# EAGLE board Hive 1.2 (EAGLE 9.6.2)
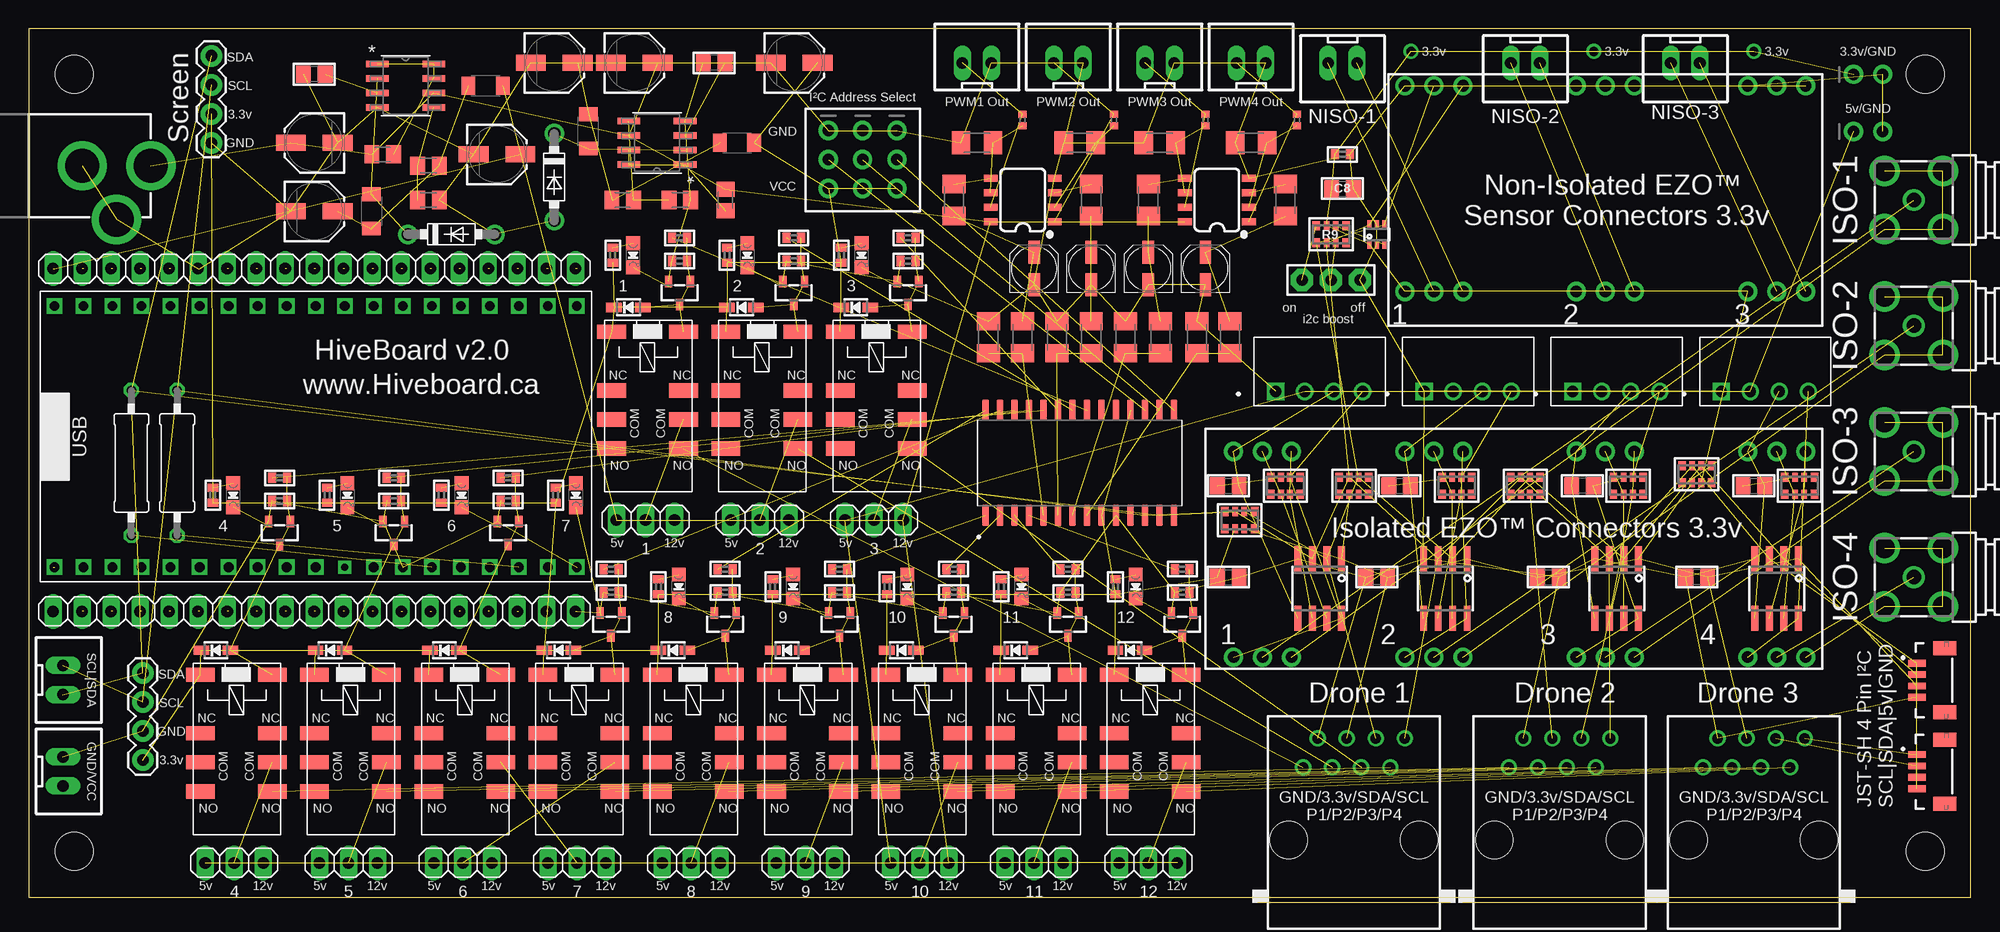
[diagram p0: board, top side]
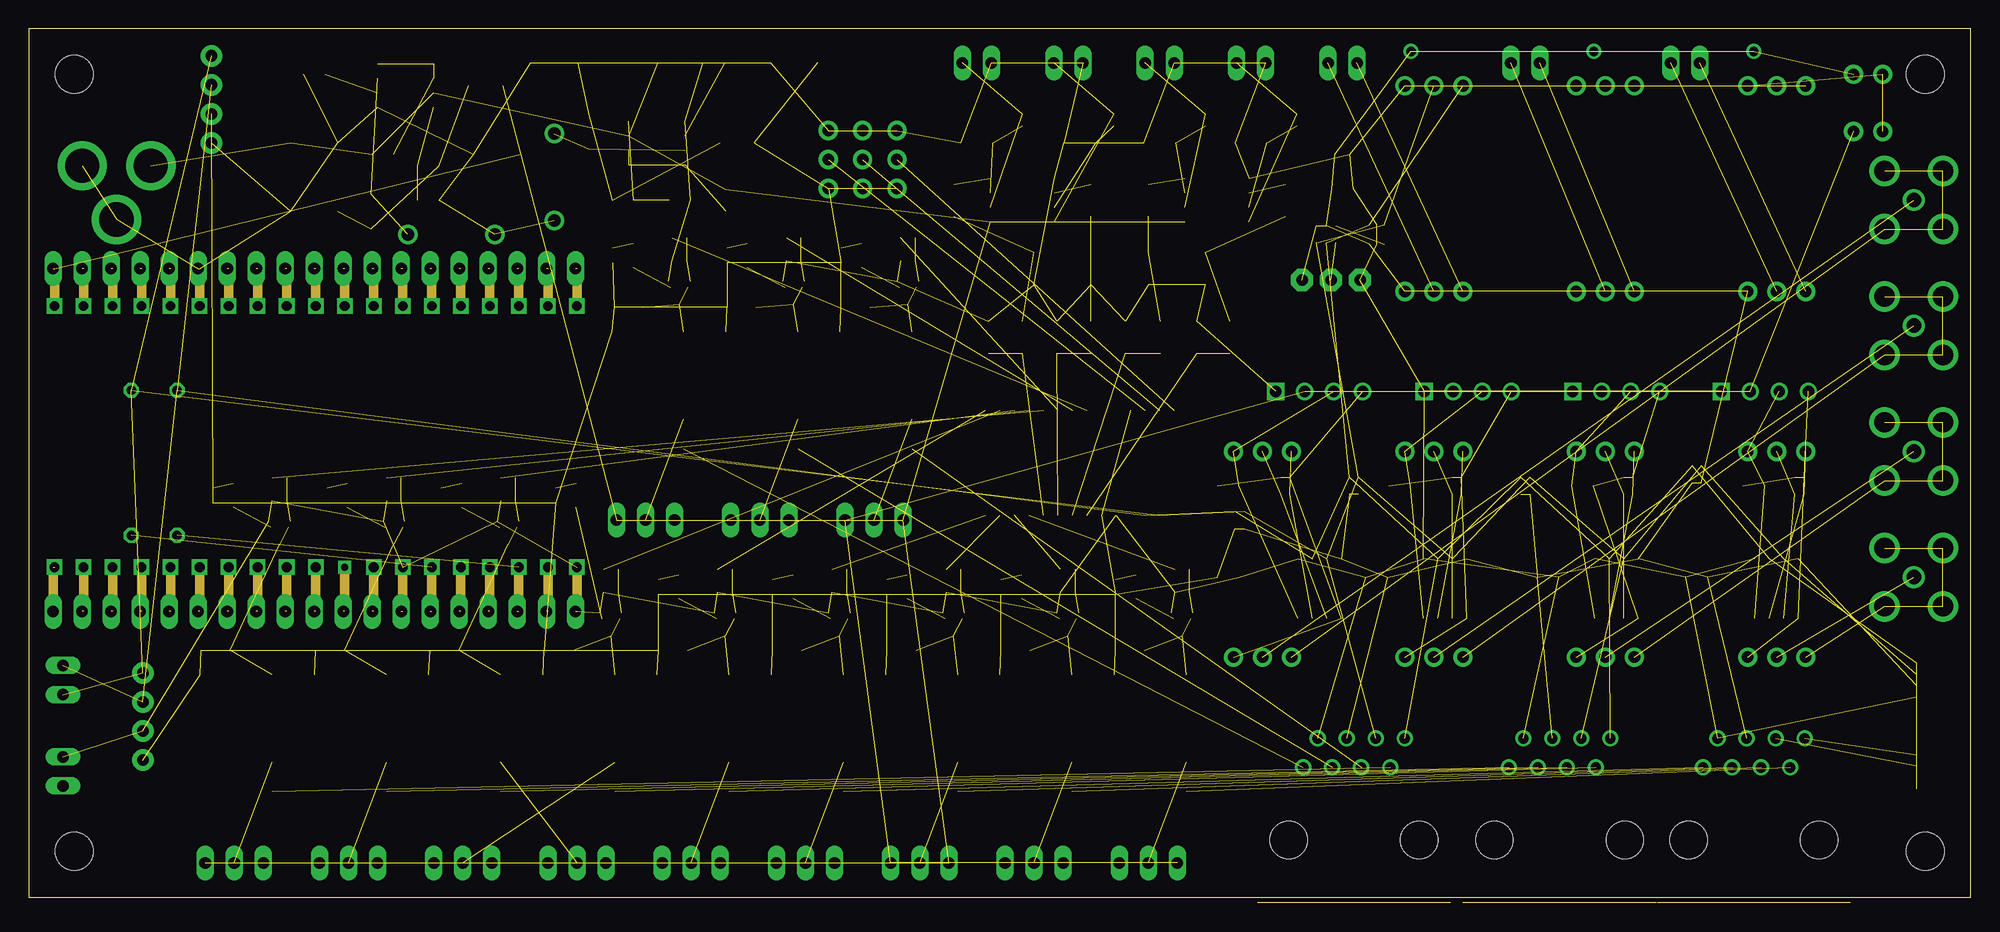
[diagram p1: board, inner layer Route2]
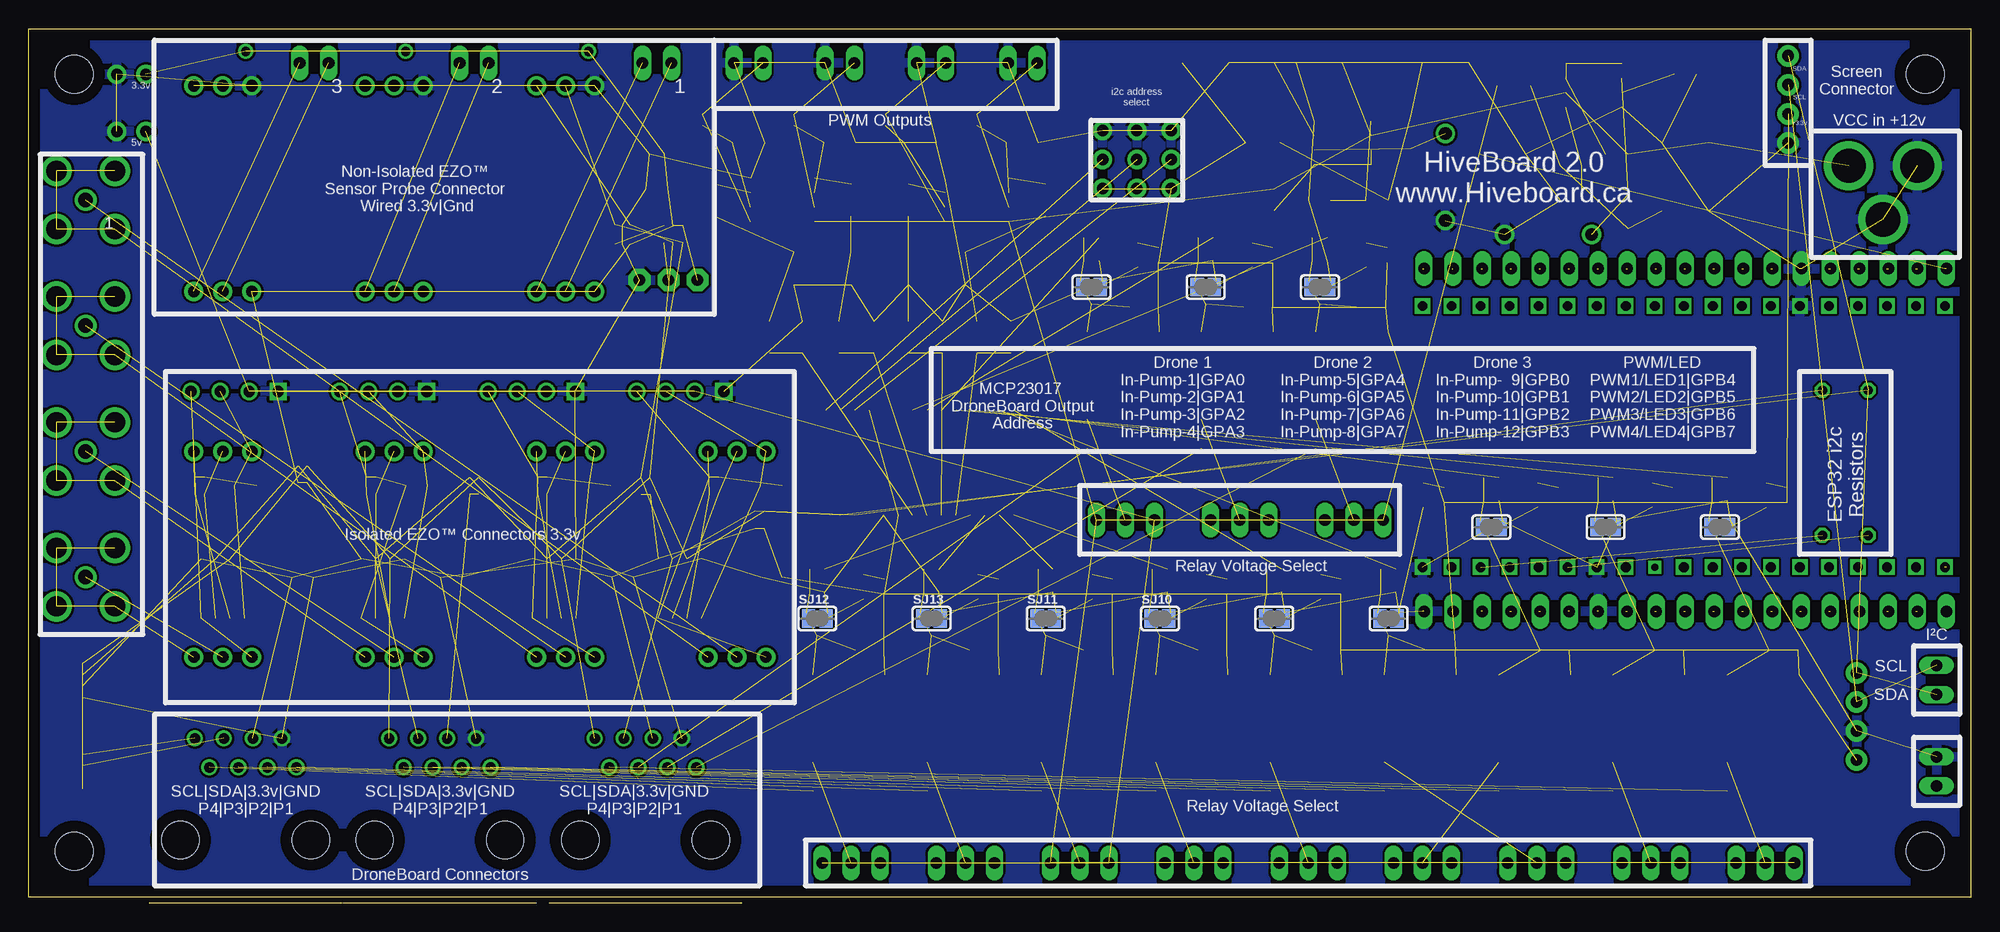
[diagram p2: board, bottom side, seen from below]

Size 170 x 76 mm. Coordinates in mm from the lower left corner, seen from the top.
Outline: 0,0 170,0 170,76 0,76 0,0
Copper layers (1+2*15+16): Top 0.035mm / dielectric 1.5mm / Route2 0.035mm / dielectric 0.15mm / Route15 0.035mm / dielectric 0.2mm / Bottom 0.035mm
Design rules "default *": minimum track width 6mil, minimum drill 0.35mm, track to track 6mil, track to pad 6mil, pad to pad 6mil, via to via 6mil, smd to smd 6mil, copper to edge 40mil, drill to drill 6mil, minimum pad ring 10mil, minimum via ring 8mil, stop-mask expansion 4mil, vias tented up to drill 0mil, thermal gap 10mil
Net classes: 0 default: width 0.254 mm, clearance 0.203 mm; 1 HV: width 0.406 mm, drill 0.381 mm, clearance 1.016 mm; 2 12v: width 0.457 mm, drill 0.102 mm, clearance 0.254 mm; 3 5v: width 0.406 mm, drill 0.102 mm, clearance 0.254 mm; 4 3.3v: width 0.406 mm, drill 0.102 mm, clearance 0.254 mm; 5 i2c: width 0.356 mm, drill 0.102 mm, clearance 0.254 mm; 6 GPIO: width 0.356 mm, drill 0.102 mm, clearance 0.254 mm; 8 New Class: drill 0.102 mm, clearance 0.152 mm

## Footprints (pad centres in the part's own frame; a part is rotated, then mirrored left to right if it is on the bottom)
PANASONIC_C = smd 2.6 x 1.4: + 2.05,0; - -2.05,0
UD-4X5,8_NICHICON = smd 2 x 1: + 1.425,0; - -1.425,0
0805 = smd 1.3 x 1.5: 1 -0.95,0; 2 0.95,0
0402 = smd 0.7 x 0.9: 1 -0.65,0; 2 0.65,0
DO41-7.6 = drill 1.1 pad 1.7: A 3.81,0; C -3.81,0
SOD-323 = smd 1.35 x 0.8: A 1.27,0; C -1.27,0
CHIPLED_0805_NOOUTLINE = smd 1.2 x 1.2: A 0,-1.05; C 0,1.05
STAND-OFF = hole 3.302: 0,0
SC70-6L = smd 0.35 x 0.8: 1 -0.65,-0.85; 2 0,-0.85; 3 0.65,-0.85; 4 0.65,0.85; 5 0,0.85; 6 -0.65,0.85
1X04 = drill 1.016 pad 1.88: 1 0,0; 2 2.54,0; 3 5.08,0; 4 7.62,0
JST04_1MM_VERT = smd 0.6 x 1.55: 1 -1.478,0.775; 2 -0.478,0.775; 3 0.522,0.775; 4 1.522,0.775 | smd 1.2 x 2: NC1 -2.778,3.2; NC2 2.822,3.2
POWER_JACK_PTH = drill 2.997 pad 4.318: GND 0,7.7; GNDBREAK 4.7,10.7; PWR 0,13.7
1X03_ROUND = drill 1 pad 1.676: 1 -2.54,0; 2 0,0; 3 2.54,0
1X01_2MM = drill 0.8 pad 1.27: 1 0,0
1X03-CLEANBIG = drill 1.016 pad 1.676: 1 -2.54,0; 2 0,0; 3 2.54,0
1X03 = drill 1.016 long: 1 -2.54,0; 2 0,0; 3 2.54,0
JUMPER3 = drill 1 pad 1.93 octagon: 1 -2.54,0; 2 0,0; 3 2.54,0
1X02_ROUND = drill 1 pad 1.676: 1 -1.27,0; 2 1.27,0
1X19 = drill 1.016 long: 1 -22.86,0; 2 -20.32,0; 3 -17.78,0; 4 -15.24,0; 5 -12.7,0; 6 -10.16,0; 7 -7.62,0; 8 -5.08,0; 9 -2.54,0; 10 0,0; 11 2.54,0; 12 5.08,0; 13 7.62,0; 14 10.16,0; 15 12.7,0; 16 15.24,0; 17 17.78,0; 18 20.32,0; 19 22.86,0
L3216C = smd 1.2 x 1.6: 1 -1.5,0; 2 1.5,0
CONV_RFM-0505S = drill 1 square: 1 -3.85,-1.75 | drill 1: 2 -1.31,-1.75; 3 1.23,-1.75; 4 3.77,-1.75
SOT23-R = smd 0.635 x 1.016: 1 -0.95,-1; 2 0.95,-1; 3 0,1
M0805 = smd 1.3 x 1.6: 1 -0.95,0; 2 0.95,0
M1206 = smd 1.6 x 2: 1 -1.4,0; 2 1.4,0
R0402 = smd 0.6 x 0.7: 1 -0.5,0; 2 0.5,0
0309/12 = drill 0.813 octagon: 1 -6.35,0; 2 6.35,0
RESPACK_4X0603 = smd 0.65 x 0.8: 1 -1.3,-0.75; 4 1.3,-0.75; 5 1.3,0.75; 8 -1.3,0.75 | smd 0.5 x 0.8: 2 -0.4,-0.75; 3 0.4,-0.75; 6 0.4,0.75; 7 -0.4,0.75
SOLDERJUMPER_CLOSEDWIRE = smd 1.168 x 1.6: 1 -0.762,0; 2 0.762,0 | smd 0.635 x 0.203: WIRE 0,0
SOIC127P1030X265-28N = smd 1.9 x 0.6: 1 -4.605,8.255; 2 -4.605,6.985; 3 -4.605,5.715; 4 -4.605,4.445; 5 -4.605,3.175; 6 -4.605,1.905; 7 -4.605,0.635; 8 -4.605,-0.635; 9 -4.605,-1.905; 10 -4.605,-3.175; 11 -4.605,-4.445; 12 -4.605,-5.715; 13 -4.605,-6.985; 14 -4.605,-8.255; 15 4.605,-8.255; 16 4.605,-6.985; 17 4.605,-5.715; 18 4.605,-4.445; 19 4.605,-3.175; 20 4.605,-1.905; 21 4.605,-0.635; 22 4.605,0.635; 23 4.605,1.905; 24 4.605,3.175; 25 4.605,4.445; 26 4.605,5.715; 27 4.605,6.985; 28 4.605,8.255
SO08 = smd 0.6 x 1.2: 1 -1.905,-2.8; 2 -0.635,-2.8; 3 0.635,-2.8; 4 1.905,-2.8; 5 1.905,2.8; 6 0.635,2.8; 7 -0.635,2.8; 8 -1.905,2.8
D8 = smd 1.981 x 0.559: 1 -2.464,1.905; 2 -2.464,0.635; 3 -2.464,-0.635; 4 -2.464,-1.905; 5 2.464,-1.905; 6 2.464,-0.635; 7 2.464,0.635; 8 2.464,1.905
ESP32 = drill 0.85 square: 3.3V 1.27,46.99; 5V 1.27,1.27; EN 1.27,44.45; GND1 1.27,13.97; GND2 24.13,46.99; GND3 24.13,31.75; GPIO0 24.13,13.97; GPIO2 24.13,11.43; GPIO4 24.13,16.51; GPIO5 24.13,24.13; GPIO6 24.13,1.27; GPIO7 24.13,3.81; GPIO8 24.13,6.35; GPIO9 1.27,8.89; GPIO10 1.27,6.35; GPIO11 1.27,3.81; GPIO12 1.27,16.51; GPIO13 1.27,11.43; GPIO14 1.27,19.05; GPIO15 24.13,8.89; GPIO16 24.13,19.05; GPIO17 24.13,21.59; GPIO19 24.13,29.21; GPIO21 24.13,34.29; GPIO22 24.13,41.91; GPIO23 24.13,44.45; GPIO25 1.27,26.67; GPIO26 1.27,24.13; GPIO27 1.27,21.59; GPIO32 1.27,31.75; GPIO33 1.27,29.21; GPIO34 1.27,36.83; GPIO35 1.27,34.29; GPIO36 1.27,41.91; GPIO39 1.27,39.37; RX 24.13,36.83; TX 24.13,39.37 | drill 0.6 square: GPIO18 24.13,26.67
JST-XH-02-PACKAGE-LONG-PAD = drill 1.016 long: 1 -1.27,0; 2 1.27,0
RELAY_EE2_NOLATCH = smd 1.25 x 2.5: 1 -6.5,-3.15; 3 -1.37,-3.15; 4 1.17,-3.15; 5 3.71,-3.15; 8 3.71,3.15; 9 1.17,3.15; 10 -1.37,3.15; 12 -6.5,3.15
SOIC8_150MIL = smd 0.6 x 2.2: 1 -1.905,-2.6; 2 -0.635,-2.6; 3 0.635,-2.6; 4 1.905,-2.6; 5 1.905,2.6; 6 0.635,2.6; 7 -0.635,2.6; 8 -1.905,2.6
RJ45-NO-SHIELD = drill 0.9 pad 1.4: 1 -4.445,6.35; 2 -3.175,8.89; 3 -1.905,6.35; 4 -0.635,8.89; 5 0.635,6.35; 6 1.905,8.89; 7 3.175,6.35; 8 4.445,8.89 | hole 3.251: -5.715,0; 5.715,0
BU-SMA-G = drill 1.27: 1 0,0 | drill 1.778: 2 -2.55,2.55; 3 2.55,2.55; 4 2.55,-2.55; 5 -2.55,-2.55

## Placement (x,y rotation side)
C1  470uF  [PANASONIC_C]  25,60 0 top
C1A1  1uf 50v  [UD-4X5,8_NICHICON]  88,55 90 top
C1A2  1uf 50v  [UD-4X5,8_NICHICON]  98,55 90 top
C1B1  1uf 50v  [UD-4X5,8_NICHICON]  93,55 90 top
C1B2  1uf 50v  [UD-4X5,8_NICHICON]  103,55 90 top
C2  100uF  [PANASONIC_C]  25,66 180 top
C3  100uF  [PANASONIC_C]  41,65 0 top
C4  470pF  [0805]  25,72 180 top
C5  470uF  [PANASONIC_C]  46,73 0 top
C6  100uF  [PANASONIC_C]  53,73 0 top
C7  10uF  [0402]  115,65 0 top
C8  0.1uF  [0805]  115,62 0 top
C9  100uF  [PANASONIC_C]  67,73 0 top
C10  0.1uF  [0805]  105,28 0 top
C11  0.1uF  [0805]  105,36 0 top
C12  0.1uF  [0805]  118,28 180 top
C13  0.1uF  [0805]  120,36 0 top
C14  0.1uF  [0805]  133,28 0 top
C15  0.1uF  [0805]  136,36 180 top
C16  0.1uF  [0805]  146,28 180 top
C17  0.1uF  [0805]  151,36 0 top
C18  470pF  [0805]  60,73 180 top
D1  1N5819-B  [DO41-7.6]  37,58 0 top
D2  1N5819-B  [DO41-7.6]  46,63 270 top
D4  1N4148  [SOD-323]  52.5,51.6 0 top
D5  RED  [CHIPLED_0805_NOOUTLINE]  52.91,56.17 180 top
D6  1N4148  [SOD-323]  62.4,51.6 0 top
D7  RED  [CHIPLED_0805_NOOUTLINE]  62.91,56.17 180 top
D8  1N4148  [SOD-323]  72.4,51.6 0 top
D9  RED  [CHIPLED_0805_NOOUTLINE]  72.91,56.17 180 top
D10  1N4148  [SOD-323]  16.4,21.6 0 top
D11  RED  [CHIPLED_0805_NOOUTLINE]  17.91,35.17 180 top
D12  1N4148  [SOD-323]  26.4,21.6 0 top
D13  RED  [CHIPLED_0805_NOOUTLINE]  27.91,35.17 180 top
D14  1N4148  [SOD-323]  36.4,21.6 0 top
D15  RED  [CHIPLED_0805_NOOUTLINE]  37.91,35.17 180 top
D16  1N4148  [SOD-323]  46.4,21.6 0 top
D17  RED  [CHIPLED_0805_NOOUTLINE]  47.91,35.17 180 top
D18  1N4148  [SOD-323]  56.4,21.6 0 top
D19  RED  [CHIPLED_0805_NOOUTLINE]  56.91,27.17 180 top
D20  1N4148  [SOD-323]  66.4,21.6 0 top
D21  RED  [CHIPLED_0805_NOOUTLINE]  66.91,27.17 180 top
D22  1N4148  [SOD-323]  76.4,21.6 0 top
D23  RED  [CHIPLED_0805_NOOUTLINE]  76.91,27.17 180 top
D24  1N4148  [SOD-323]  96.4,21.6 0 top
D25  RED  [CHIPLED_0805_NOOUTLINE]  96.91,27.17 180 top
D26  1N4148  [SOD-323]  86.4,21.6 0 top
D27  RED  [CHIPLED_0805_NOOUTLINE]  86.91,27.17 180 top
H1  STAND-OFF  [STAND-OFF]  4,72 0 top
H2  STAND-OFF  [STAND-OFF]  4,4 0 top
H3  STAND-OFF  [STAND-OFF]  166,4 0 top
H4  STAND-OFF  [STAND-OFF]  166,72 0 top
IC2  LTC4311_SC70  [SC70-6L]  118,58 0 top
J1  C2886705  [1X04]  10,12 90 top
J3  C2886705  [1X04]  16,66 90 top
J6  Vertical Qwiic Connector  [JST04_1MM_VERT]  164.5,19 270 top
J7  Vertical Qwiic Connector  [JST04_1MM_VERT]  164.5,11 270 top
J8  POWER_JACK  [POWER_JACK_PTH]  -3,64 270 top
JP1  [1X03_ROUND]  76,64.54 270 top
JP2  [1X03_ROUND]  73,64.54 270 top
JP3  [1X03_ROUND]  70,64.54 270 top
JP4  [1X01_2MM]  151,74 0 top
JP5  C2886705  [1X03-CLEANBIG]  123,71 180 top
JP6  C2886705  [1X03-CLEANBIG]  123,53 0 top
JP7  C2886705  [1X03-CLEANBIG]  138,71 180 top
JP8  C2886705  [1X03-CLEANBIG]  138,53 0 top
JP9  C2886705  [1X03-CLEANBIG]  153,71 180 top
JP10  C2886705  [1X03-CLEANBIG]  153,53 0 top
JP11  [1X03]  54,33 180 top
JP12  C2886705  [1X03-CLEANBIG]  108,39 180 top
JP13  C2886705  [1X03-CLEANBIG]  108,21 0 top
JP14  C2886705  [1X03-CLEANBIG]  123,39 180 top
JP15  C2886705  [1X03-CLEANBIG]  123,21 0 top
JP16  C2886705  [1X03-CLEANBIG]  138,39 180 top
JP17  C2886705  [1X03-CLEANBIG]  138,21 0 top
JP18  C2886705  [1X03-CLEANBIG]  153,39 180 top
JP19  C2886705  [1X03-CLEANBIG]  153,21 0 top
JP20  [1X03]  64,33 180 top
JP21  [1X03]  74,33 180 top
JP22  [1X03]  18,3 180 top
JP23  [1X03]  28,3 180 top
JP24  [1X03]  48,3 180 top
JP25  [1X03]  38,3 180 top
JP26  [1X03]  58,3 180 top
JP27  [1X03]  68,3 180 top
JP28  [1X03]  78,3 180 top
JP29  [1X03]  88,3 180 top
JP30  [1X03]  98,3 180 top
JP31  [JUMPER3]  114,54 180 top
JP32  [1X01_2MM]  137,74 0 top
JP33  [1X01_2MM]  121,74 0 top
JP34  [1X02_ROUND]  161,72 0 top
JP35  [1X02_ROUND]  161,67 0 top
JP38  [1X19]  25,55 180 top
JP39  [1X19]  25,25 180 top
L1  220uH  [L3216C]  30,60 270 top
L2  1uH  [L3216C]  40,71 0 top
L3  220uH  [L3216C]  49,67 90 top
L4  1uH  [L3216C]  62,66 0 top
PS1  RFM-0505S  [CONV_RFM-0505S]  113,46 0 top
PS2  RFM-0505S  [CONV_RFM-0505S]  126,46 0 top
PS3  RFM-0505S  [CONV_RFM-0505S]  139,46 0 top
PS4  RFM-0505S  [CONV_RFM-0505S]  152,46 0 top
Q3  MMBT2222  [SOT23-R]  56.97,52.87 180 top
Q5  MMBT2222  [SOT23-R]  66.97,52.87 180 top
Q6  MMBT2222  [SOT23-R]  76.97,52.87 180 top
Q7  MMBT2222  [SOT23-R]  21.97,31.87 180 top
Q8  MMBT2222  [SOT23-R]  31.97,31.87 180 top
Q9  MMBT2222  [SOT23-R]  41.97,31.87 180 top
Q10  MMBT2222  [SOT23-R]  50.97,23.87 180 top
Q11  MMBT2222  [SOT23-R]  60.97,23.87 180 top
Q12  MMBT2222  [SOT23-R]  70.97,23.87 180 top
Q13  MMBT2222  [SOT23-R]  80.97,23.87 180 top
Q14  MMBT2222  [SOT23-R]  100.97,23.87 180 top
Q15  MMBT2222  [SOT23-R]  90.97,23.87 180 top
R1  1K  [M0805]  35,61 180 top
R1A1  100kΩ  [M1206]  87,49 270 top
R1A2  100kΩ  [M1206]  99.07,49 270 top
R1B1  100kΩ  [M1206]  93,49 90 top
R1B2  100kΩ  [M1206]  105.14,49 90 top
R2  3K  [M0805]  35,64 180 top
R2A1  100kΩ  [M1206]  83,66 0 top
R2A2  100kΩ  [M1206]  99,66 0 top
R2B1  100kΩ  [M1206]  92,66 180 top
R2B2  100kΩ  [M1206]  107,66 180 top
R3  0.33R  [M0805]  31,65 0 top
R4  200KΩ  [R0402]  87,68 90 top
R4A1  75kΩ  [M1206]  98,61 90 top
R4A2  75kΩ  [M1206]  81,61 90 top
R4B1  75kΩ  [M1206]  93,61 90 top
R4B2  75kΩ  [M1206]  110,61 90 top
R5  200KΩ  [R0402]  95,68 90 top
R5A1  10kΩ  [M1206]  84,49 90 top
R5A2  10kΩ  [M1206]  96,49 90 top
R5B1  10kΩ  [M1206]  90,49 90 top
R5B2  10kΩ  [M1206]  102.27,49 90 top
R6  2.4k  [0309/12]  9,38 90 top
R7  2.4k  [0309/12]  13,38 90 top
R8  2.2K  [M0805]  52,61 0 top
R9  10K  [RESPACK_4X0603]  114,58 0 top
R10  200KΩ  [R0402]  103,68 90 top
R11  200KΩ  [R0402]  111,68 90 top
R12  100KΩ  [RESPACK_4X0603]  106,33 180 top
R13  10KΩ  [RESPACK_4X0603]  116,36 180 top
R14  100KΩ  [RESPACK_4X0603]  110,36 0 top
R15  1.2K  [M0805]  57,61 180 top
R16  10KΩ  [RESPACK_4X0603]  125,36 0 top
R17  10KΩ  [RESPACK_4X0603]  131,36 180 top
R18  10KΩ  [RESPACK_4X0603]  140,36 0 top
R19  0.33R  [M0805]  61,61 270 top
R20  10KΩ  [RESPACK_4X0603]  146,37 180 top
R21  10KΩ  [RESPACK_4X0603]  155,36 0 top
R26  1K  [0402]  56.97,57.7 0 top
R27  10K  [0402]  56.97,55.66 0 top
R28  1K  [0402]  51.13,56.17 270 top
R29  1K  [0402]  66.97,57.7 0 top
R30  10K  [0402]  66.97,55.66 0 top
R31  1K  [0402]  61.13,56.17 270 top
R32  1K  [0402]  76.97,57.7 0 top
R33  10K  [0402]  76.97,55.66 0 top
R34  1K  [0402]  71.13,56.17 270 top
R35  1K  [0402]  21.97,36.7 0 top
R36  10K  [0402]  21.97,34.66 0 top
R37  1K  [0402]  16.13,35.17 270 top
R38  1K  [0402]  31.97,36.7 0 top
R39  10K  [0402]  31.97,34.66 0 top
R40  1K  [0402]  26.13,35.17 270 top
R41  1K  [0402]  41.97,36.7 0 top
R42  10K  [0402]  41.97,34.66 0 top
R43  1K  [0402]  36.13,35.17 270 top
R44  1K  [0402]  50.97,28.7 0 top
R45  10K  [0402]  50.97,26.66 0 top
R46  1K  [0402]  46.13,35.17 270 top
R47  1K  [0402]  60.97,28.7 0 top
R48  10K  [0402]  60.97,26.66 0 top
R49  1K  [0402]  55.13,27.17 270 top
R50  1K  [0402]  70.97,28.7 0 top
R51  10K  [0402]  70.97,26.66 0 top
R52  1K  [0402]  65.13,27.17 270 top
R53  1K  [0402]  80.97,28.7 0 top
R54  10K  [0402]  80.97,26.66 0 top
R55  1K  [0402]  75.13,27.17 270 top
R56  1K  [0402]  100.97,28.7 0 top
R57  10K  [0402]  100.97,26.66 0 top
R58  1K  [0402]  95.13,27.17 270 top
R59  1K  [0402]  90.97,28.7 0 top
R60  10K  [0402]  90.97,26.66 0 top
R61  1K  [0402]  85.13,27.17 270 top
SJ2  [SOLDERJUMPER_CLOSEDWIRE]  56.97,53.38 0 bottom
SJ3  [SOLDERJUMPER_CLOSEDWIRE]  66.97,53.38 0 bottom
SJ4  [SOLDERJUMPER_CLOSEDWIRE]  76.97,53.38 0 bottom
SJ5  [SOLDERJUMPER_CLOSEDWIRE]  21.97,32.38 0 bottom
SJ6  [SOLDERJUMPER_CLOSEDWIRE]  31.97,32.38 0 bottom
SJ7  [SOLDERJUMPER_CLOSEDWIRE]  41.97,32.38 0 bottom
SJ8  [SOLDERJUMPER_CLOSEDWIRE]  50.97,24.38 0 bottom
SJ9  [SOLDERJUMPER_CLOSEDWIRE]  60.97,24.38 0 bottom
SJ10  [SOLDERJUMPER_CLOSEDWIRE]  70.97,24.38 0 bottom
SJ11  [SOLDERJUMPER_CLOSEDWIRE]  80.97,24.38 0 bottom
SJ12  [SOLDERJUMPER_CLOSEDWIRE]  100.97,24.38 0 bottom
SJ13  [SOLDERJUMPER_CLOSEDWIRE]  90.97,24.38 0 bottom
U1  MCP23017-E/SO  [SOIC127P1030X265-28N]  92,38 90 top
U2  LM358  [SO08]  87,61 90 top
U3  LM358  [SO08]  104,61 90 top
U4  MC34063ADR  [D8]  33,71 0 top
U5  MC34063ADR  [D8]  55,66 180 top
U$2  ESP32  [ESP32]  1,53 270 top
X1  PWM2  [JST-XH-02-PACKAGE-LONG-PAD]  91,73 0 top
X2  PWM1  [JST-XH-02-PACKAGE-LONG-PAD]  83,73 0 top
X3  jst-xh-2  [JST-XH-02-PACKAGE-LONG-PAD]  3,19 270 top
X5  RELAY_NONLATCHING-EE2NUH  [RELAY_EE2_NOLATCH]  54.18,42.96 270 top
X6  PWM3  [JST-XH-02-PACKAGE-LONG-PAD]  99,73 0 top
X7  PWM4  [JST-XH-02-PACKAGE-LONG-PAD]  107,73 0 top
X8  ISO154X  [SOIC8_150MIL]  113,27 180 top
X9  RJ45-6L-B  [RJ45-NO-SHIELD]  116,5 0 top
X10  ISO154X  [SOIC8_150MIL]  124,27 180 top
X11  jst-xh-2  [JST-XH-02-PACKAGE-LONG-PAD]  115,73 180 top
X12  ISO154X  [SOIC8_150MIL]  139,27 180 top
X13  RJ45-6L-B  [RJ45-NO-SHIELD]  134,5 0 top
X14  jst-xh-2  [JST-XH-02-PACKAGE-LONG-PAD]  131,73 180 top
X15  ISO154X  [SOIC8_150MIL]  153,27 180 top
X16  RJ45-6L-B  [RJ45-NO-SHIELD]  151,5 0 top
X17  jst-xh-2  [JST-XH-02-PACKAGE-LONG-PAD]  145,73 180 top
X18  BU-SMA-G  [BU-SMA-G]  165,61 0 top
X19  BU-SMA-G  [BU-SMA-G]  165,50 0 top
X20  BU-SMA-G  [BU-SMA-G]  165,39 0 top
X21  BU-SMA-G  [BU-SMA-G]  165,28 0 top
X22  jst-xh-2  [JST-XH-02-PACKAGE-LONG-PAD]  3,11 270 top
X23  RELAY_NONLATCHING-EE2NUH  [RELAY_EE2_NOLATCH]  64.18,42.96 270 top
X24  RELAY_NONLATCHING-EE2NUH  [RELAY_EE2_NOLATCH]  74.18,42.96 270 top
X25  RELAY_NONLATCHING-EE2NUH  [RELAY_EE2_NOLATCH]  18.18,12.96 270 top
X26  RELAY_NONLATCHING-EE2NUH  [RELAY_EE2_NOLATCH]  28.18,12.96 270 top
X27  RELAY_NONLATCHING-EE2NUH  [RELAY_EE2_NOLATCH]  38.18,12.96 270 top
X28  RELAY_NONLATCHING-EE2NUH  [RELAY_EE2_NOLATCH]  48.18,12.96 270 top
X29  RELAY_NONLATCHING-EE2NUH  [RELAY_EE2_NOLATCH]  58.18,12.96 270 top
X30  RELAY_NONLATCHING-EE2NUH  [RELAY_EE2_NOLATCH]  68.18,12.96 270 top
X31  RELAY_NONLATCHING-EE2NUH  [RELAY_EE2_NOLATCH]  78.18,12.96 270 top
X32  RELAY_NONLATCHING-EE2NUH  [RELAY_EE2_NOLATCH]  98.18,12.96 270 top
X33  RELAY_NONLATCHING-EE2NUH  [RELAY_EE2_NOLATCH]  88.18,12.96 270 top

## Library data of the parts
C1-C18 D4-D27 IC2 JP1-JP4 JP31-JP35 Q3 Q5-Q15 R9 R12-R14 R16-R18 R20 R21 R26-R61 SJ2-SJ13 X5 X23-X33 = microbuilder
C1A1 C1A2 C1B1 C1B2 = rcl
D1 D2 = diode
H1-H4 = SparkFun-Hardware
J1 J3 = SparkFun-Connectors
J6 J7 = SparkFun-Connectors; PROD_ID: CONN-14483
J8 = SparkFun-Connectors; PROD_ID: CONN-08197
JP5-JP10 JP12-JP19 R1A1 R1A2 R1B1 R1B2 R2A1 R2A2 R2B1 R2B2 R4A1 R4A2 R4B1 R4B2 R5A1 R5A2 R5B1 R5B2 = adafruit
JP11 JP20-JP30 JP38 JP39 = pinhead
L1-L4 = rcl; SPICEPREFIX: L
PS1-PS4 = RFM-0505S; AVAILABILITY: In Stock; DESCRIPTION: 1W DC/DC-Converter 'ECONOLINE' SIP4 1kV unreg; MF: Recom Power; MP: RFM-0505S; PACKAGE: SIP-4 Recom Power; PRICE: None; PURCHASE-URL: https://pricing.snapeda.com/search/part/RFM-0505S/?ref=eda
R1-R8 R10 R11 R15 R19 = rcl; SPICEPREFIX: R
U1 = MCP23017-E_SO; AVAILABILITY: In Stock; DESCRIPTION: I/O Expander 16 I²C 1.7 MHz 28-SOIC; MF: Microchip; MP: MCP23017-E/SO; PACKAGE: SOIC-28 Microchip; PRICE: None; PURCHASE-URL: https://pricing.snapeda.com/search/part/MCP23017-E/SO/?ref=eda
U2 U3 = SparkFun-IC-Amplifiers
U4 U5 = MC34063ADR; MANUFACTURER_PART_NUMBER: MC34063ADR; VENDOR: Texas Instruments
U$2 = ESP32
X1-X3 X6 X7 X17 X22 = Rembrandt Electronics - JST XH Connectors v1-0
X8 X10 X12 X15 = adafruit_power
X9 X13 X16 = con-tycoelectronics; MPN: RJ45-6L-B; OC_FARNELL: unknown; OC_NEWARK: 16R6090
X11 = Rembrandt Electronics - JST XH Connectors v1-0; E4: NISO-1
X14 = Rembrandt Electronics - JST XH Connectors v1-0; T: NISO-2
X18-X21 = con-coax; OC_FARNELL: unknown; OC_NEWARK: unknown

## Nets
3.3V: C7.1 C8.1 C9.+ C10.1 C12.1 C14.1 C16.1 D4.C D6.C D8.C D10.C D12.C D14.C D16.C D18.C D20.C D22.C D24.C D26.C IC2.1 J1.1 J3.2 J6.3 J7.3 JP1.3 JP2.3 JP3.3 JP4.1 JP6.1 JP8.1 JP10.1 JP31.3 JP32.1 JP33.1 JP34.1 L4.2 R9.7 R9.8 R12.6 R12.7 R13.6 R13.7 R17.6 R17.7 R20.6 R20.7 R28.2 R31.2 R34.2 R37.2 R40.2 R43.2 R46.2 R49.2 R52.2 R55.2 R58.2 R61.2 U1.9 U1.18 X5.1 X8.1 X9.4 X10.1 X12.1 X13.4 X15.1 X16.4 X23.1 X24.1 X25.1 X26.1 X27.1 X28.1 X29.1 X30.1 X31.1 X32.1 X33.1
+5V [5v]: C3.+ JP11.3 JP20.3 JP21.3 JP22.3 JP23.3 JP24.3 JP25.3 JP26.3 JP27.3 JP28.3 JP29.3 JP30.3 JP35.1 JP38.19 L2.2 PS1.2 PS2.2 PS3.2 PS4.2 U$2.5V
+12V [12v]: C2.+ C6.+ J8.PWR JP11.1 JP20.1 JP21.1 JP22.1 JP23.1 JP24.1 JP25.1 JP26.1 JP27.1 JP28.1 JP29.1 JP30.1 R3.1 R19.1 U2.8 U3.8 U4.6 U5.6
EN: IC2.3 R9.6
GND: C1.- C1A1.- C1A2.- C1B1.- C1B2.- C2.- C3.- C4.2 C5.- C6.- C7.2 C8.2 C9.- C10.2 C12.2 C14.2 C16.2 C18.2 D1.A D2.A IC2.2 IC2.5 J1.2 J3.1 J6.4 J7.4 J8.GND J8.GNDBREAK JP1.1 JP2.1 JP3.1 JP5.3 JP7.3 JP9.3 JP31.1 JP34.2 JP35.2 JP38.14 JP39.1 JP39.7 PS1.1 PS2.1 PS3.1 PS4.1 Q3.2 Q5.2 Q6.2 Q7.2 Q8.2 Q9.2 Q10.2 Q11.2 Q12.2 Q13.2 Q14.2 Q15.2 R1.1 R2A1.1 R2A2.1 R2B1.2 R2B2.2 R5A1.2 R5A2.2 R5B1.2 R5B2.2 R15.1 R27.1 R30.1 R33.1 R36.1 R39.1 R42.1 R45.1 R48.1 R51.1 R54.1 R57.1 R60.1 U1.10 U2.4 U3.4 U4.4 U5.4 U$2.GND1 U$2.GND2 U$2.GND3 X1.2 X2.2 X6.2 X7.2 X8.4 X9.2 X10.4 X12.4 X13.2 X15.4 X16.2 X22.1
I2CVCC: X22.2
IN-PUMP-1: R26.1 U1.21
IN-PUMP-2: R29.1 U1.22
IN-PUMP-3: R32.1 U1.23
IN-PUMP-4: R35.1 U1.24
IN-PUMP-5 [GPIO]: R38.1 U1.25
IN-PUMP-6 [GPIO]: R41.1 U1.26
IN-PUMP-7 [GPIO]: R44.1 U1.27
IN-PUMP-8 [GPIO]: R47.1 U1.28
IN-PUMP-9 [GPIO]: R50.1 U1.1
IN-PUMP-10 [GPIO]: R53.1 U1.2
IN-PUMP-11 [GPIO]: R59.1 U1.3
IN-PUMP-12 [GPIO]: R56.1 U1.4
IN-PWM-1: R1A1.2 R5A1.1 U1.5
IN-PWM-2: R1B1.1 R5B1.1 U1.6
IN-PWM-3: R1A2.2 R5A2.1 U1.7
IN-PWM-4: R1B2.1 R5B2.1 U1.8
ISO-1-5V: C11.1 JP13.1 PS1.4 R14.6 R14.7 X8.8
ISO-2-5V: C13.1 JP15.1 PS2.4 R16.6 R16.7 X10.8
ISO-3-5V: C15.1 JP17.1 PS3.4 R18.6 R18.7 X12.8
ISO-4-5V: C17.1 JP19.1 PS4.4 R21.6 R21.7 X15.8
ISO-GND-1: C11.2 JP12.3 PS1.3 X8.5
ISO-GND-2: C13.2 JP14.3 PS2.3 X10.5
ISO-GND-3: C15.2 JP16.3 PS3.3 X12.5
ISO-GND-4: C17.2 JP18.3 PS4.3 X15.5
ISO-PRB-1+: JP13.2 X18.1
ISO-PRB-1GND: JP13.3 X18.2 X18.3 X18.4 X18.5
ISO-PRB-2+: JP15.2 X19.1
ISO-PRB-2GND: JP15.3 X19.2 X19.3 X19.4 X19.5
ISO-PRB-3+: JP17.2 X20.1
ISO-PRB-3GND: JP17.3 X20.2 X20.3 X20.4 X20.5
ISO-PRB-4+: JP19.2 X21.1
ISO-PRB-4GND: JP19.3 X21.2 X21.3 X21.4 X21.5
N$1: C1A1.+ R1A1.1 R4A2.1
N$2: D1.C L1.1 U4.2
N$3: C1.+ L1.2 L2.1 R2.1
N$4: C4.1 U4.3
N$5: C1B1.+ R1B1.2 R4B1.1
N$6: R2A1.2 R4.1 U2.6
N$7: R1.2 R2.2 U4.5
N$8: R2B1.1 R5.1 U2.2
N$9: R3.2 U4.1 U4.7 U4.8
N$10: R4A2.2 U2.5
N$11: R4B1.2 U2.3
N$12: D2.C L3.1 U5.2
N$13: D4.A Q3.3 SJ2.1 X5.12
N$14: Q3.1 R26.2 R27.2
N$15: D6.A Q5.3 SJ3.1 X23.12
N$16: D5.A R28.1
N$17: D5.C SJ2.2
N$18: Q5.1 R29.2 R30.2
N$19: D8.A Q6.3 SJ4.1 X24.12
N$20: D7.A R31.1
N$21: D7.C SJ3.2
N$22: C18.1 U5.3
N$23: Q6.1 R32.2 R33.2
N$24: R8.2 R15.2 U5.5
N$25: R19.2 U5.1 U5.7 U5.8
N$26: C5.+ L3.2 L4.1 R8.1
N$27: D10.A Q7.3 SJ5.1 X25.12
N$28: D9.A R34.1
N$29: D9.C SJ4.2
N$30: Q7.1 R35.2 R36.2
N$31: D12.A Q8.3 SJ6.1 X26.12
N$32: D11.A R37.1
N$33: D11.C SJ5.2
N$34: Q8.1 R38.2 R39.2
N$35: D14.A Q9.3 SJ7.1 X27.12
N$36: D13.A R40.1
N$37: D13.C SJ6.2
N$38: Q9.1 R41.2 R42.2
N$39: D16.A Q10.3 SJ8.1 X28.12
N$40: D15.A R43.1
N$41: D15.C SJ7.2
N$42: Q10.1 R44.2 R45.2
N$43: D18.A Q11.3 SJ9.1 X29.12
N$44: D17.A R46.1
N$45: D17.C SJ8.2
N$46: Q11.1 R47.2 R48.2
N$47: D20.A Q12.3 SJ10.1 X30.12
N$48: D19.A R49.1
N$49: D19.C SJ9.2
N$50: Q12.1 R50.2 R51.2
N$51: D22.A Q13.3 SJ11.1 X31.12
N$52: D21.A R52.1
N$53: C1A2.+ R1A2.1 R4A1.1
N$54: C1B2.+ R1B2.2 R4B2.1
N$55: R2A2.2 R10.1 U3.6
N$56: R2B2.1 R11.1 U3.2
N$57: R4A1.2 U3.5
N$58: R4B2.2 U3.3
N$59: D21.C SJ10.2
N$60: Q13.1 R53.2 R54.2
N$61: D24.A Q14.3 SJ12.1 X32.12
N$62: D23.A R55.1
N$63: D23.C SJ11.2
N$64: Q14.1 R56.2 R57.2
N$65: JP38.1 U$2.3.3V
N$66: D25.A R58.1
N$67: D25.C SJ12.2
N$68: JP38.2 U$2.EN
N$69: D26.A Q15.3 SJ13.1 X33.12
N$70: Q15.1 R59.2 R60.2
N$71: JP38.3 U$2.GPIO36
N$72: D27.A R61.1
N$73: D27.C SJ13.2
N$74: JP1.2 U1.15
N$75: JP2.2 U1.16
N$76: JP3.2 U1.17
N$77: JP38.4 U$2.GPIO39
N$78: JP38.5 U$2.GPIO34
N$79: JP38.6 U$2.GPIO35
N$80: JP38.7 U$2.GPIO32
N$81: JP38.8 U$2.GPIO33
N$82: JP38.9 U$2.GPIO25
N$83: JP38.10 U$2.GPIO26
N$84: JP38.11 U$2.GPIO27
N$85: JP38.12 U$2.GPIO14
N$86: JP38.13 U$2.GPIO12
N$87: JP31.2 R9.3
N$89: JP38.16 U$2.GPIO9
N$90: JP38.15 U$2.GPIO13
N$91: JP38.17 U$2.GPIO10
N$92: JP38.18 U$2.GPIO11
N$94: JP39.19 U$2.GPIO6
N$95: JP39.18 U$2.GPIO7
N$96: JP39.17 U$2.GPIO8
N$97: JP39.16 U$2.GPIO15
N$98: JP39.15 U$2.GPIO2
N$99: JP39.14 U$2.GPIO0
N$100: JP39.13 U$2.GPIO4
N$101: JP39.12 U$2.GPIO16
N$102: JP39.11 U$2.GPIO17
N$103: JP39.10 U$2.GPIO5
N$104: JP39.9 U$2.GPIO18
N$105: JP39.8 U$2.GPIO19
N$108: JP39.5 U$2.RX
N$109: JP39.4 U$2.TX
N$111: JP39.2 U$2.GPIO23
NISO-PRB-1+: JP6.2 X11.2
NISO-PRB-1GND: JP6.3 X11.1
NISO-PRB-2+: JP8.2 X14.2
NISO-PRB-2GND: JP8.3 X14.1
NISO-PRB-3+: JP10.2 X17.2
NISO-PRB-3GND: JP10.3 X17.1
PWM-OUT-1: R4.2 U2.7 X2.1
PWM-OUT-2: R5.2 U2.1 X1.1
PWM-OUT-3: R10.2 U3.7 X6.1
PWM-OUT-4: R11.2 U3.1 X7.1
RELAY1PWRIN [HV]: JP11.2 X5.9
RELAY1PWROUT [HV]: X5.8 X9.1
RELAY2PWRIN [HV]: JP20.2 X23.9
RELAY2PWROUT [HV]: X9.3 X23.8
RELAY3PWRIN [HV]: JP21.2 X24.9
RELAY3PWROUT [HV]: X9.5 X24.8
RELAY4PWRIN [HV]: JP22.2 X25.9
RELAY4PWROUT [HV]: X9.7 X25.8
RELAY5PWRIN [HV]: JP23.2 X26.9
RELAY5PWROUT [HV]: X13.1 X26.8
RELAY6PWRIN [HV]: JP25.2 X28.9
RELAY6PWROUT [HV]: X13.3 X27.8
RELAY7PWRIN [HV]: JP24.2 X27.9
RELAY7PWROUT [HV]: X13.5 X28.8
RELAY8PWRIN [HV]: JP26.2 X29.9
RELAY8PWROUT [HV]: X13.7 X29.8
RELAY9PWRIN [HV]: JP27.2 X30.9
RELAY9PWROUT [HV]: X16.1 X30.8
RELAY10PWRIN [HV]: JP28.2 X31.9
RELAY10PWROUT [HV]: X16.3 X31.8
RELAY11PWRIN [HV]: JP29.2 X33.9
RELAY11PWROUT [HV]: X16.5 X33.8
RELAY12PWRIN [HV]: JP30.2 X32.9
RELAY12PWROUT [HV]: X16.7 X32.8
SCL [i2c]: IC2.6 J1.3 J3.3 J6.1 J7.1 JP5.1 JP7.1 JP9.1 R7.2 R9.2 R12.3 R13.3 R17.3 R20.3 U1.12 X3.1 X8.3 X9.8 X10.3 X12.3 X13.8 X15.3 X16.8
SCL1: JP39.3 R7.1 U$2.GPIO22
SCL2: JP12.1 R14.3 X8.6
SCL3: JP14.1 R16.3 X10.6
SCL4: JP16.1 R18.3 X12.6
SCL5: JP18.1 R21.3 X15.6
SDA [i2c]: IC2.4 J1.4 J3.4 J6.2 J7.2 JP5.2 JP7.2 JP9.2 R6.2 R9.1 R12.2 R13.2 R17.2 R20.2 U1.13 X3.2 X8.2 X9.6 X10.2 X12.2 X13.6 X15.2 X16.6
SDA1: JP39.6 R6.1 U$2.GPIO21
SDA2: JP12.2 R14.2 X8.7
SDA3: JP14.2 R16.2 X10.7
SDA4: JP16.2 R18.2 X12.7
SDA5: JP18.2 R21.2 X15.7

## Tracks (layer width: path | path; a pad name or v marks a point on that pad's centre or on a via)
3.3V  (78 unrouted)
+5V  (20 unrouted)
  Route2 0.813: U$2.5V 2.27,54.98 2.27,55
+12V  (20 unrouted)
EN  (1 unrouted)
GND  (97 unrouted)
  Route2 0.813: U$2.GND3 32.75,25 | U$2.GND2 47.99,25 | U$2.GND1 14.97,55
  pour Bottom: 0,0 170,0 170,41 170,76 71,76 0,76
IN-PUMP-1  (1 unrouted)
IN-PUMP-2  (1 unrouted)
IN-PUMP-3  (1 unrouted)
IN-PUMP-4  (1 unrouted)
IN-PUMP-5  (1 unrouted)
IN-PUMP-6  (1 unrouted)
IN-PUMP-7  (1 unrouted)
IN-PUMP-8  (1 unrouted)
IN-PUMP-9  (1 unrouted)
IN-PUMP-10  (1 unrouted)
IN-PUMP-11  (1 unrouted)
IN-PUMP-12  (1 unrouted)
IN-PWM-1  (2 unrouted)
IN-PWM-2  (2 unrouted)
IN-PWM-3  (2 unrouted)
IN-PWM-4  (2 unrouted)
ISO-1-5V  (5 unrouted)
ISO-2-5V  (5 unrouted)
ISO-3-5V  (5 unrouted)
ISO-4-5V  (5 unrouted)
ISO-GND-1  (3 unrouted)
ISO-GND-2  (3 unrouted)
ISO-GND-3  (3 unrouted)
ISO-GND-4  (3 unrouted)
ISO-PRB-1+  (1 unrouted)
ISO-PRB-1GND  (4 unrouted)
ISO-PRB-2+  (1 unrouted)
ISO-PRB-2GND  (4 unrouted)
ISO-PRB-3+  (1 unrouted)
ISO-PRB-3GND  (4 unrouted)
ISO-PRB-4+  (1 unrouted)
ISO-PRB-4GND  (4 unrouted)
N$1  (2 unrouted)
N$2  (2 unrouted)
N$3  (3 unrouted)
N$4  (1 unrouted)
N$5  (2 unrouted)
N$6  (2 unrouted)
N$7  (2 unrouted)
N$8  (2 unrouted)
N$9  (3 unrouted)
N$10  (1 unrouted)
N$11  (1 unrouted)
N$12  (2 unrouted)
N$13  (3 unrouted)
N$14  (2 unrouted)
N$15  (3 unrouted)
N$16  (1 unrouted)
N$17  (1 unrouted)
N$18  (2 unrouted)
N$19  (3 unrouted)
N$20  (1 unrouted)
N$21  (1 unrouted)
N$22  (1 unrouted)
N$23  (2 unrouted)
N$24  (2 unrouted)
N$25  (3 unrouted)
N$26  (3 unrouted)
N$27  (3 unrouted)
N$28  (1 unrouted)
N$29  (1 unrouted)
N$30  (2 unrouted)
N$31  (3 unrouted)
N$32  (1 unrouted)
N$33  (1 unrouted)
N$34  (2 unrouted)
N$35  (3 unrouted)
N$36  (1 unrouted)
N$37  (1 unrouted)
N$38  (2 unrouted)
N$39  (3 unrouted)
N$40  (1 unrouted)
N$41  (1 unrouted)
N$42  (2 unrouted)
N$43  (3 unrouted)
N$44  (1 unrouted)
N$45  (1 unrouted)
N$46  (2 unrouted)
N$47  (3 unrouted)
N$48  (1 unrouted)
N$49  (1 unrouted)
N$50  (2 unrouted)
N$51  (3 unrouted)
N$52  (1 unrouted)
N$53  (2 unrouted)
N$54  (2 unrouted)
N$55  (2 unrouted)
N$56  (2 unrouted)
N$57  (1 unrouted)
N$58  (1 unrouted)
N$59  (1 unrouted)
N$60  (2 unrouted)
N$61  (3 unrouted)
N$62  (1 unrouted)
N$63  (1 unrouted)
N$64  (2 unrouted)
N$65  (1 unrouted)
  Route2 0.813: U$2.3.3V 47.99,54.98 47.99,55
N$66  (1 unrouted)
N$67  (1 unrouted)
N$68  (1 unrouted)
  Route2 0.813: U$2.EN 45.45,54.98 45.45,55
N$69  (3 unrouted)
N$70  (2 unrouted)
N$71  (1 unrouted)
  Route2 0.813: U$2.GPIO36 42.91,54.98 42.91,55
N$72  (1 unrouted)
N$73  (1 unrouted)
N$74  (1 unrouted)
N$75  (1 unrouted)
N$76  (1 unrouted)
N$77  (1 unrouted)
  Route2 0.813: U$2.GPIO39 40.37,54.98 40.37,55
N$78  (1 unrouted)
  Route2 0.813: U$2.GPIO34 37.83,54.98 37.83,55
N$79  (1 unrouted)
  Route2 0.813: U$2.GPIO35 35.29,54.98 35.29,55
N$80  (1 unrouted)
  Route2 0.813: U$2.GPIO32 32.75,54.98 32.75,55
N$81  (1 unrouted)
  Route2 0.813: U$2.GPIO33 30.21,54.98 30.21,55
N$82  (1 unrouted)
  Route2 0.813: U$2.GPIO25 27.67,54.98 27.67,55
N$83  (1 unrouted)
  Route2 0.813: U$2.GPIO26 25.13,54.98 25.13,55
N$84  (1 unrouted)
  Route2 0.813: U$2.GPIO27 22.59,54.98 22.59,55
N$85  (1 unrouted)
  Route2 0.813: U$2.GPIO14 20.05,54.98 20.05,55
N$86  (1 unrouted)
  Route2 0.813: U$2.GPIO12 17.51,54.98 17.51,55
N$87  (1 unrouted)
N$89  (1 unrouted)
  Route2 0.813: U$2.GPIO9 9.89,54.98 9.89,55
N$90  (1 unrouted)
  Route2 0.813: U$2.GPIO13 12.43,54.98 12.43,55
N$91  (1 unrouted)
  Route2 0.813: U$2.GPIO10 7.35,54.98 7.35,55
N$92  (1 unrouted)
  Route2 0.813: U$2.GPIO11 4.81,54.98 4.81,55
N$94  (1 unrouted)
  Route2 0.813: 2.14,28.87 JP39.19
N$95  (1 unrouted)
  Route2 0.813: U$2.GPIO7 4.81,25.03 4.81,25
N$96  (1 unrouted)
  Route2 0.813: U$2.GPIO8 7.35,25.03 7.35,25
N$97  (1 unrouted)
  Route2 0.813: U$2.GPIO15 9.89,25.03 9.89,25
N$98  (1 unrouted)
  Route2 0.813: U$2.GPIO2 12.43,25.03 12.43,25
N$99  (1 unrouted)
  Route2 0.813: U$2.GPIO0 14.97,25.03 14.97,25
N$100  (1 unrouted)
  Route2 0.813: U$2.GPIO4 17.51,25.03 17.51,25
N$101  (1 unrouted)
  Route2 0.813: U$2.GPIO16 20.05,25.03 20.05,25
N$102  (1 unrouted)
  Route2 0.813: U$2.GPIO17 22.59,25.03 22.59,25
N$103  (1 unrouted)
  Route2 0.813: U$2.GPIO5 25.13,25.03 25.13,25
N$104  (1 unrouted)
  Route2 0.813: U$2.GPIO18 27.67,25.03 27.67,25
N$105  (1 unrouted)
  Route2 0.813: U$2.GPIO19 30.21,25.03 30.21,25
N$108  (1 unrouted)
  Route2 0.813: U$2.RX 37.83,25.03 37.83,25
N$109  (1 unrouted)
  Route2 0.813: U$2.TX 40.37,25.03 40.37,25
N$111  (1 unrouted)
  Route2 0.813: U$2.GPIO23 45.45,25.03 45.45,25
NISO-PRB-1+  (1 unrouted)
NISO-PRB-1GND  (1 unrouted)
NISO-PRB-2+  (1 unrouted)
NISO-PRB-2GND  (1 unrouted)
NISO-PRB-3+  (1 unrouted)
NISO-PRB-3GND  (1 unrouted)
PWM-OUT-1  (2 unrouted)
PWM-OUT-2  (2 unrouted)
PWM-OUT-3  (2 unrouted)
PWM-OUT-4  (2 unrouted)
RELAY1PWRIN  (1 unrouted)
RELAY1PWROUT  (1 unrouted)
RELAY2PWRIN  (1 unrouted)
RELAY2PWROUT  (1 unrouted)
RELAY3PWRIN  (1 unrouted)
RELAY3PWROUT  (1 unrouted)
RELAY4PWRIN  (1 unrouted)
RELAY4PWROUT  (1 unrouted)
RELAY5PWRIN  (1 unrouted)
RELAY5PWROUT  (1 unrouted)
RELAY6PWRIN  (1 unrouted)
RELAY6PWROUT  (1 unrouted)
RELAY7PWRIN  (1 unrouted)
RELAY7PWROUT  (1 unrouted)
RELAY8PWRIN  (1 unrouted)
RELAY8PWROUT  (1 unrouted)
RELAY9PWRIN  (1 unrouted)
RELAY9PWROUT  (1 unrouted)
RELAY10PWRIN  (1 unrouted)
RELAY10PWROUT  (1 unrouted)
RELAY11PWRIN  (1 unrouted)
RELAY11PWROUT  (1 unrouted)
RELAY12PWRIN  (1 unrouted)
RELAY12PWROUT  (1 unrouted)
SCL  (22 unrouted)
SCL1  (2 unrouted)
  Route2 0.813: U$2.GPIO22 42.91,25.03 42.91,25
SCL2  (2 unrouted)
SCL3  (2 unrouted)
SCL4  (2 unrouted)
SCL5  (2 unrouted)
SDA  (22 unrouted)
SDA1  (2 unrouted)
  Route2 0.813: U$2.GPIO21 35.29,25.03 35.29,25
SDA2  (2 unrouted)
SDA3  (2 unrouted)
SDA4  (2 unrouted)
SDA5  (2 unrouted)

## Text on the board
tPlace: ⏚ | ⏚ | ⏚ | ⏚ | ⏚ | ⏚ | ⏚ | SDA | 3.3v | 3.3v | 3.3v | 3.3v/GND | SCL | I²C Address Select | PWM1 Out | PWM2 Out | PWM3 Out | PWM4 Out | 5v/GND | 3.3v | NISO-3 | GND | Screen | GND | VCC | Non-Isolated EZO™ / Sensor Connectors 3.3v | ISO-1 | 1 | 2 | 3 | on | off | i2c boost | 1 | 2 | 3 | ISO-2 | HiveBoard v2.0 | www.Hiveboard.ca | ISO-3 | 4 | 5 | 6 | 7 | 5v | 12v | 5v | 12v | 5v | 12v | Isolated EZO™ Connectors 3.3v | 1 | 2 | 3 | ISO-4 | 8 | 9 | 10 | 11 | 12 | 1 | 2 | 3 | 4 | SDA | SCL|SDA | SCL | Drone 1 | Drone 2 | Drone 3 | JST-SH 4 Pin I²C / SCL|SDA|5v|GND | GND | 3.3v | GND/VCC | GND/3.3v/SDA/SCL / P1/P2/P3/P4 | GND/3.3v/SDA/SCL / P1/P2/P3/P4 | GND/3.3v/SDA/SCL / P1/P2/P3/P4 | 5v | 12v | 5v | 12v | 5v | 12v | 5v | 12v | 5v | 12v | 5v | 12v | 5v | 12v | 5v | 12v | 5v | 12v | 4 | 5 | 6 | 7 | 8 | 9 | 10 | 11 | 12
bPlace: Screen / Connector | SDA | ⏚ | ⏚ | ⏚ | ⏚ | 1 | ⏚ | 2 | ⏚ | 3 | ⏚ | 3.3v | ⏚ | SCL | i2c address / select | VCC in +12v | +3.3v | PWM Outputs | 5v | ⏚ | ⏚ | HiveBoard 2.0 / www.Hiveboard.ca | Non-Isolated EZO™ / Sensor Probe Connector / Wired 3.3v|Gnd | 1 | PWM/LED / PWM1/LED1|GPB4 / PWM2/LED2|GPB5 / PWM3/LED3|GPB6 / PWM4/LED4|GPB7 | Drone 3 / In-Pump- 9|GPB0 / In-Pump-10|GPB1 / In-Pump-11|GPB2 / In-Pump-12|GPB3 | Drone 2 / In-Pump-5|GPA4 / In-Pump-6|GPA5 / In-Pump-7|GPA6 / In-Pump-8|GPA7 | Drone 1 / In-Pump-1|GPA0 / In-Pump-2|GPA1 / In-Pump-3|GPA2 / In-Pump-4|GPA3 | MCP23017 / DroneBoard Output / Address | ESP32 i2c / Resistors | Isolated EZO™ Connectors 3.3v | Relay Voltage Select | I²C | SCL | SDA | ⏚ | ⏚ | ⏚ | ⏚ | Relay Voltage Select | SCL|SDA|3.3v|GND / P4|P3|P2|P1 | SCL|SDA|3.3v|GND / P4|P3|P2|P1 | SCL|SDA|3.3v|GND / P4|P3|P2|P1 | ⏚ | ⏚ | ⏚ | DroneBoard Connectors | 4
tValues: Nathan Seidle | Rev V13 by Patrick Alberts